# EAGLE board taad_copy (EAGLE 6.2)

Size 100 x 80 mm. Coordinates in mm from the lower left corner, seen from the top.
Outline: 20.6,0 0,0 0,25.6
Outline: 60.6,0 100,0 100,80 0,80 0,25.6
Outline: 20.6,0 16.8,6.5 12.5,4 0,25.6
Outline: 0,25.6 4.3,28.1 0.5,34.6 20.6,69.3 28.1,69.3 28.1,74.3 53.1,74.3 53.1,69.3 60.6,69.3 80.6,34.6 76.8,28.1 81.2,25.6 68.7,4 64.4,6.5 60.6,0
Outline: 60.6,0 20.6,0
Copper layers (1*16): Top 0.035mm / dielectric 1.5mm / Bottom 0.035mm
Design rules: minimum track width 10mil, minimum drill 24mil, track to track 8mil, track to pad 8mil, pad to pad 8mil, via to via 8mil, smd to smd 8mil, copper to edge 40mil, drill to drill 8mil, minimum pad ring 10mil, minimum via ring 8mil, stop-mask expansion 4mil, vias tented up to drill 0mil, thermal gap 10mil
Holes 3 mm at 40.6,21.1 40.6,48.1 29.6,4 51.6,4 8.5,40.4 21.5,63.5 59.5,63 72.7,40.4 40.6,63.3 16,20 65.1,20
tRestrict: area 19.6,-1 to 61.6,9; area -1.2,29.3 to 28.4,70.7; area 52.3,29.3 to 81.9,70.7

## Footprints (pad centres in the part's own frame; a part is rotated, then mirrored left to right if it is on the bottom)
CHIP-LED0805 = smd 1.2 x 1.2: A 0,-1.05; C 0,1.05
R0805 = smd 1.3 x 1.5: 1 -0.85,0; 2 0.85,0
C0805 = smd 1.3 x 1.5: 1 -0.95,0; 2 0.95,0
LPCC16 = smd 0.8 x 0.3: 1 3,2.25; 2 3,1.75; 3 3,1.25; 4 3,0.75; 9 0,0.75; 10 0,1.25; 11 0,1.75; 12 0,2.25 | smd 0.3 x 0.8: 5 2.25,0; 6 1.75,0; 7 1.25,0; 8 0.75,0; 13 0.75,3; 14 1.25,3; 15 1.75,3; 16 2.25,3
B3F-10XX = drill 1.016 long: 1 -3.251,2.261; 2 3.251,2.261; 3 -3.251,-2.261; 4 3.251,-2.261
1X03 = drill 1.016 long: 1 -2.54,0; 2 0,0; 3 2.54,0
LGA-28L = smd 0.8 x 0.25: 1 2.5,1.25; 2 2.5,0.75; 3 2.5,0.25; 4 2.5,-0.25; 5 2.5,-0.75; 6 2.5,-1.25; 15 -2.5,-1.25; 16 -2.5,-0.75; 17 -2.5,-0.25; 18 -2.5,0.25; 19 -2.5,0.75; 20 -2.5,1.25 | smd 0.25 x 0.8: 7 1.75,-2; 8 1.25,-2; 9 0.75,-2; 10 0.25,-2; 11 -0.25,-2; 12 -0.75,-2; 13 -1.25,-2; 14 -1.75,-2; 21 -1.75,2; 22 -1.25,2; 23 -0.75,2; 24 -0.25,2; 25 0.25,2; 26 0.75,2; 27 1.25,2; 28 1.75,2
QSOP16 = smd 0.45 x 1.5: 1 -2.223,-2.69; 2 -1.587,-2.69; 3 -0.953,-2.69; 4 -0.318,-2.69; 5 0.318,-2.69; 6 0.953,-2.69; 7 1.587,-2.69; 8 2.223,-2.69; 9 2.223,2.69; 10 1.587,2.69; 11 0.953,2.69; 12 0.318,2.69; 13 -0.318,2.69; 14 -0.953,2.69; 15 -1.587,2.69; 16 -2.223,2.69
SOT223 = smd 1.5 x 2: 1 -2.3,-3.15; 2 0,-3.15; 3 2.3,-3.15 | smd 3.8 x 2: 4 0,3.15
C0805' = smd 1.3 x 1.5: 1 -0.85,0; 2 0.85,0
QFP50P900X900X160-48N = smd 1.473 x 0.279: 1 -4.115,2.743; 2 -4.115,2.261; 3 -4.115,1.753; 4 -4.115,1.245; 5 -4.115,0.762; 6 -4.115,0.254; 7 -4.115,-0.254; 8 -4.115,-0.762; 9 -4.115,-1.245; 10 -4.115,-1.753; 11 -4.115,-2.261; 12 -4.115,-2.743; 25 4.115,-2.743; 26 4.115,-2.261; 27 4.115,-1.753; 28 4.115,-1.245; 29 4.115,-0.762; 30 4.115,-0.254; 31 4.115,0.254; 32 4.115,0.762; 33 4.115,1.245; 34 4.115,1.753; 35 4.115,2.261; 36 4.115,2.743 | smd 0.279 x 1.473: 13 -2.743,-4.115; 14 -2.261,-4.115; 15 -1.753,-4.115; 16 -1.245,-4.115; 17 -0.762,-4.115; 18 -0.254,-4.115; 19 0.254,-4.115; 20 0.762,-4.115; 21 1.245,-4.115; 22 1.753,-4.115; 23 2.261,-4.115; 24 2.743,-4.115; 37 2.743,4.115; 38 2.261,4.115; 39 1.753,4.115; 40 1.245,4.115; 41 0.762,4.115; 42 0.254,4.115; 43 -0.254,4.115; 44 -0.762,4.115; 45 -1.245,4.115; 46 -1.753,4.115; 47 -2.261,4.115; 48 -2.743,4.115
HC49/S = drill 0.813: 1 -2.413,0; 2 2.413,0
PIN_HEADERS = drill 1.016 long: 1 -8.89,6.35; 2 -8.89,3.81; 3 -8.89,1.27; 4 -8.89,-1.27; 5 -8.89,-3.81; 6 -8.89,-6.35; 7 8.89,-6.35; 8 8.89,-3.81; 9 8.89,-1.27; 10 8.89,1.27; 11 8.89,3.81; 12 8.89,6.35
DO35-7 = drill 0.813 long: A 3.81,0; C -3.81,0
32005-201 = smd 3.1 x 0.5: 1 3,1.6; 2 3,0.8; 3 3,0; 4 3,-0.8; 5 3,-1.6 | smd 2.5 x 2: M1 -3,-4.45; M2 -3,4.45 | smd 3.3 x 2: M3 2.9,4.45; M4 2.9,-4.45 | hole 0.9: 0,2.2; 0,-2.2

## Placement (x,y rotation side)
AC_S  [CHIP-LED0805]  26.25,41 0 top
AC_SR  2.2k  [R0805]  28.69,40.99 90 top
ACC1  100n  [C0805]  35.75,35 270 top
ACC2  10µ  [C0805]  35.75,30 90 top
ACC3  100n  [C0805]  42,29.75 0 top
ACC4  10n  [C0805]  45.25,34.75 90 top
C_CR  2.2k  [R0805]  45.11,40.54 180 top
C_DR  2.2k  [R0805]  40.5,44.5 0 top
CC1  0.22µ  [C0805]  36,44.5 180 top
CC2  4.7µ  [C0805]  36,40.5 180 top
COMPASS  HMC5883L  [LPCC16]  39.1,39 0 top
CPUC1  2.2µ  [C0805]  68.41,17.28 0 top
CPUC2  10µ  [C0805]  36.72,18.75 90 top
ERASE  [B3F-10XX]  6.4,22.8 300 top
ESC1_CONN  [1X03]  12.5,9.5 240 bottom
ESC2_CONN  [1X03]  48.1,72 0 top
ESC3_CONN  [1X03]  68.7,10 240 top
GY_S  [CHIP-LED0805]  26.25,36.5 0 top
GY_SR  2.2k  [R0805]  28.75,36.5 90 top
GYRO/ACCEL  LSM330DLC  [LGA-28L]  40.6,34.7 0 top
I/O-PWM  [QSOP16]  49.6,17.25 270 top
IC1  LD117AS33TR  [SOT223]  28.5,20.5 270 top
LDOC1  100n  [C0805']  18,26.5 90 top
LDOC2  100n  [C0805']  20.5,24.5 90 top
LED_3V3  [CHIP-LED0805]  19,23 180 top
LED_5V  [CHIP-LED0805]  62,20.5 180 top
MPU  ATSAM3S2AA-AU  [QFP50P900X900X160-48N]  48,56.5 0 top
PWM_S  [CHIP-LED0805]  54.39,24.04 270 top
PWM_SR  2.2k  [R0805]  54.19,21.21 0 top
PWMC1  10µ  [C0805]  56.33,53.03 0 top
Q1  16 MHz  [HC49/S]  64.63,26.92 0 top
R_3V3  160  [R0805]  22.5,23.5 90 top
R_5V  160  [R0805]  59.5,20.5 90 top
RESET  [B3F-10XX]  75.1,22.77 60 top
RF  MRF24J40MA_TRANSEIVER_MODULE  [PIN_HEADERS]  40.6,34.6 0 top
RF_I  [CHIP-LED0805]  21.89,28.61 270 top
RF_IR  2.2k  [R0805]  26.69,28.31 0 top
RF_S  [CHIP-LED0805]  22.14,32.53 270 top
RF_SR  2.2k  [R0805]  26.79,32.56 0 top
S1R  2.2k  [R0805]  24.5,7.25 0 top
S2R  2.2k  [R0805]  57.5,7.25 0 top
S3R  2.2k  [R0805]  73,34 120 top
S4R  2.2k  [R0805]  55.75,63.75 120 top
S5R  2.2k  [R0805]  25.25,64 240 top
S6R  2.2k  [R0805]  8,33.75 240 top
SRV1_CONN  [1X03]  16,11.5 120 top
SRV2_CONN  [1X03]  65,12 240 top
SRV3_CONN  [1X03]  61.44,14.11 240 top
SRV4_CONN  [1X03]  48.25,68.5 0 top
SRV5_CONN  [1X03]  48.25,64.75 0 top
SRV6_CONN  [1X03]  19.64,13.52 120 top
TWI_D  [CHIP-LED0805]  45,47 270 top
TWI_R  2.2k  [R0805]  45,44.5 0 top
USBD  1N4148DO35-7  [DO35-7]  37.5,52 180 top
USBR1  27  [R0805]  33.5,60 180 top
USBR2  27  [R0805]  33.5,63 0 top
USBR3  27k  [R0805]  34.5,55.5 0 top
USBR4  47k  [R0805]  39,55.5 0 top
X1  MINI-USB-32005-201  [32005-201]  34.45,69.5 270 top
XINC  10p  [C0805']  53.44,28.53 90 top
XOUTC  10p  [C0805']  57,28.5 90 top

## Library data of the parts
AC_S GY_S LED_3V3 LED_5V PWM_S RF_I RF_S TWI_D = led
AC_SR C_CR C_DR GY_SR LDOC1 LDOC2 PWM_SR R_3V3 R_5V RF_IR RF_SR S1R S2R S3R S4R S5R S6R TWI_R USBR1-USBR4 XINC XOUTC = resistor
ACC1-ACC4 CC1 CC2 CPUC1 CPUC2 PWMC1 = rcl
COMPASS = HMC5883L
ERASE RESET = switch-omron; MPN: B3F-1000; OC_FARNELL: 176432; OC_NEWARK: 36M3542
ESC1_CONN ESC2_CONN ESC3_CONN SRV1_CONN SRV2_CONN SRV3_CONN SRV4_CONN SRV5_CONN SRV6_CONN = pinhead
GYRO/ACCEL = LSM330DLC
I/O-PWM = max696x
IC1 = v-reg
MPU = ATSAM3S2AA-AU; DESCRIPTION: Flash MCU; MPN: ATSAM3S2AA-AU; OC_FARNELL: 1841652; OC_NEWARK: 12T1310; PACKAGE: QFP-48; SUPPLIER: Atmel
Q1 = crystal; OC_FARNELL: 1667008; OC_NEWARK: unknown
RF = MRF24J40MA
USBD = diode
X1 = con-cypressindustries; OC_FARNELL: unknown; OC_NEWARK: unknown

## Nets
+3V3: ACC1.1 ACC2.1 ACC3.1 C_CR.1 C_DR.1 COMPASS.2 COMPASS.4 COMPASS.13 CPUC2.1 ERASE.3 GYRO/ACCEL.7 GYRO/ACCEL.8 GYRO/ACCEL.9 GYRO/ACCEL.10 GYRO/ACCEL.11 GYRO/ACCEL.12 GYRO/ACCEL.13 GYRO/ACCEL.14 GYRO/ACCEL.21 GYRO/ACCEL.25 I/O-PWM.16 IC1.4 LDOC2.2 MPU.7 MPU.13 MPU.33 MPU.47 PWMC1.1 RF.10
+5V: ESC3_CONN.1 R_5V.1 S1R.2 S2R.2 S3R.2 S4R.2 S5R.2 S6R.2 SRV1_CONN.2 SRV2_CONN.2 SRV3_CONN.2 SRV4_CONN.2 SRV5_CONN.2 SRV6_CONN.2
DEN_G: GYRO/ACCEL.16 MPU.9
ESC1: ESC1_CONN.3 MPU.36
ESC2: ESC2_CONN.3 MPU.35
ESC3: ESC3_CONN.3 MPU.32
GND: AC_S.C ACC1.2 ACC2.2 ACC3.2 ACC4.2 CC2.2 COMPASS.9 COMPASS.11 CPUC1.2 CPUC2.2 ESC1_CONN.2 ESC2_CONN.2 ESC3_CONN.2 GY_S.C GYRO/ACCEL.1 GYRO/ACCEL.2 GYRO/ACCEL.3 GYRO/ACCEL.4 GYRO/ACCEL.5 GYRO/ACCEL.6 I/O-PWM.8 IC1.1 LDOC1.1 LDOC2.1 LED_3V3.C LED_5V.C MPU.2 MPU.34 PWM_S.C RF.1 RF.11 RF.12 RF_I.C RF_S.C SRV1_CONN.1 SRV2_CONN.1 SRV3_CONN.1 SRV4_CONN.1 SRV5_CONN.1 SRV6_CONN.1 TWI_D.C USBR4.1 X1.5 XINC.2 XOUTC.2
INT1_A: GYRO/ACCEL.20 MPU.15
INT1_G: GYRO/ACCEL.18 MPU.10
INT2_A: GYRO/ACCEL.19 MPU.14
INT2_G: GYRO/ACCEL.17 MPU.11
N$1: MPU.46 Q1.2 XINC.1
N$2: MPU.45 Q1.1 XOUTC.1
N$3: USBR2.1 X1.3
N$4: USBR1.1 X1.2
N$5: MPU.44 USBR2.2
N$7: LED_5V.A R_5V.2
N$9: CPUC1.1 MPU.8 MPU.18 MPU.41 MPU.48 RESET.3
N$10: ERASE.1 MPU.42
N$11: COMPASS.15 MPU.24
N$13: I/O-PWM.6 S4R.1 SRV4_CONN.3
N$14: I/O-PWM.14 MPU.26
N$16: MPU.43 USBR1.2
N$17: USBD.A USBR3.1 X1.1
N$18: MPU.12 USBR3.2 USBR4.2
N$19: C_CR.2 COMPASS.1 MPU.28
N$20: LED_3V3.A R_3V3.2
N$21: C_DR.2 COMPASS.16 MPU.31 TWI_R.2
N$22: TWI_D.A TWI_R.1
N$23: I/O-PWM.9 S6R.1 SRV6_CONN.3
N$24: ESC1_CONN.1 IC1.3 LDOC1.2 R_3V3.1 USBD.C
N$25: CC1.2 COMPASS.8
N$28: I/O-PWM.7 S5R.1 SRV5_CONN.3
N$29: PWM_S.A PWM_SR.1
N$30: AC_S.A AC_SR.1
N$31: RF_S.A RF_SR.1
N$32: CC1.1 COMPASS.12
N$33: CC2.1 COMPASS.10
N$34: ACC4.1 GYRO/ACCEL.15
N$35: GY_S.A GY_SR.1
N$36: I/O-PWM.3 S1R.1 SRV1_CONN.3
N$37: I/O-PWM.4 S2R.1 SRV2_CONN.3
N$38: I/O-PWM.5 S3R.1 SRV3_CONN.3
N$40: RF_I.A RF_IR.1
NPCS0: GY_SR.2 GYRO/ACCEL.22 MPU.20
NPCS1: MPU.22 RF.8 RF_SR.2
NPCS2: AC_SR.2 GYRO/ACCEL.23 MPU.21
NPCS3: I/O-PWM.2 MPU.27 PWM_SR.2
PWMC1: PWMC1.2
RESET: MPU.29 RESET.1 RF.2
RF_INT: MPU.23 RF.4 RF_IR.2
RF_WAKE: MPU.4 RF.3
SCK: GYRO/ACCEL.24 I/O-PWM.1 MPU.16 RF.6
SDA: GYRO/ACCEL.28 I/O-PWM.15 MPU.17 RF.5
SDO: GYRO/ACCEL.26 GYRO/ACCEL.27 MPU.19 RF.7

## Tracks (layer width: path | path; a pad name or v marks a point on that pad's centre or on a via)
+3V3  (28 unrouted)
+5V  (13 unrouted)
DEN_G  (1 unrouted)
ESC1  (1 unrouted)
ESC2  (1 unrouted)
ESC3  (1 unrouted)
GND  (44 unrouted)
INT1_A  (1 unrouted)
INT1_G  (1 unrouted)
INT2_A  (1 unrouted)
INT2_G  (1 unrouted)
N$1  (2 unrouted)
N$2  (2 unrouted)
N$3  (1 unrouted)
N$4  (1 unrouted)
N$5  (1 unrouted)
N$7  (1 unrouted)
N$9  (5 unrouted)
N$10  (1 unrouted)
N$11  (1 unrouted)
N$13  (2 unrouted)
N$14  (1 unrouted)
N$16  (1 unrouted)
N$17  (2 unrouted)
N$18  (2 unrouted)
N$19  (2 unrouted)
N$20  (1 unrouted)
N$21  (3 unrouted)
N$22  (1 unrouted)
N$23  (2 unrouted)
N$24  (4 unrouted)
N$25  (1 unrouted)
N$28  (2 unrouted)
N$29  (1 unrouted)
N$30  (1 unrouted)
N$31  (1 unrouted)
N$32  (1 unrouted)
N$33  (1 unrouted)
N$34  (1 unrouted)
N$35  (1 unrouted)
N$36  (2 unrouted)
N$37  (2 unrouted)
N$38  (2 unrouted)
N$40  (1 unrouted)
NPCS0  (2 unrouted)
NPCS1  (2 unrouted)
NPCS2  (2 unrouted)
NPCS3  (2 unrouted)
RESET  (2 unrouted)
RF_INT  (2 unrouted)
RF_WAKE  (1 unrouted)
SCK  (3 unrouted)
SDA  (3 unrouted)
SDO  (3 unrouted)